# EAGLE board graduate project tinkercad (EAGLE 9.7.0)

Size 212.76 x 136.27 mm. Coordinates in mm from the lower left corner, seen from the top.
Outline: 0,0 212.76,0 212.76,136.27 0,136.27 0,0
Copper layers (1*16): Top 0.035mm / dielectric 1.5mm / Bottom 0.035mm
Design rules "default": minimum track width 6mil, minimum drill 0.35mm, track to track 6mil, track to pad 6mil, pad to pad 6mil, via to via 6mil, smd to smd 6mil, copper to edge 40mil, drill to drill 6mil, minimum pad ring 10mil, minimum via ring 8mil, stop-mask expansion 4mil, vias tented up to drill 0mil, thermal gap 10mil

## Footprints (pad centres in the part's own frame; a part is rotated, then mirrored left to right if it is on the bottom)
LEDRD254W60D565H860B = drill 0.981 pad 1.581: 1 -1.27,0; 2 1.27,0
RESAD1016W63L850D250B = drill 0.83 pad 1.43: 1 -5.08,0; 2 5.08,0
HA-06-SM065 = drill 1 pad 1.676: 1 -2.54,-2.54; 2 0,2.54; 3 2.54,-2.54
SWITCH-SPDT-PTH-8.5X3.7MM = drill 1.016 pad 1.88: 1 -2.54,0; 2 0,0; 3 2.54,0
ARDUINO-UNO-R3-SHIELD = drill 1.016 pad 1.88: 3.3V 24.13,-2.54; 5V 24.13,0; A0 24.13,12.7; A1 24.13,15.24; A2 24.13,17.78; A3 24.13,20.32; A4 24.13,22.86; A5 24.13,25.4; AREF -24.13,-13.97; D2 -24.13,20.32; D3 -24.13,17.78; D4 -24.13,15.24; D5 -24.13,12.7; D6 -24.13,10.16; D7 -24.13,7.62; D8 -24.13,3.81; D9 -24.13,1.27; D10 -24.13,-1.27; D11 -24.13,-3.81; D12 -24.13,-6.35; D13 -24.13,-8.89; GND@0 24.13,2.54; GND@1 24.13,5.08; GND@2 -24.13,-11.43; IOREF 24.13,-7.62; NC 24.13,-10.16; RES 24.13,-5.08; RX -24.13,25.4; SCL -24.13,-19.05; SDA -24.13,-16.51; TX -24.13,22.86; VIN 24.13,7.62
JHD-162A = drill 1.016 long: 1 -19.05,0; 2 -16.51,0; 3 -13.97,0; 4 -11.43,0; 5 -8.89,0; 6 -6.35,0; 7 -3.81,0; 8 -1.27,0; 9 1.27,0; 10 3.81,0; 11 6.35,0; 12 8.89,0; 13 11.43,0; 14 13.97,0; 15 16.51,0; 16 19.05,0
DIL16 = drill 0.813 long: 1 -8.89,-3.81; 2 -6.35,-3.81; 3 -3.81,-3.81; 4 -1.27,-3.81; 5 1.27,-3.81; 6 3.81,-3.81; 7 6.35,-3.81; 8 8.89,-3.81; 9 8.89,3.81; 10 6.35,3.81; 11 3.81,3.81; 12 1.27,3.81; 13 -1.27,3.81; 14 -3.81,3.81; 15 -6.35,3.81; 16 -8.89,3.81

## Placement (x,y rotation side)
D9  RED  [LEDRD254W60D565H860B]  91.09,56.82 180 top
D10  RED  [LEDRD254W60D565H860B]  96.17,56.82 180 top
D11  RED  [LEDRD254W60D565H860B]  101.25,56.82 180 top
D12  RED  [LEDRD254W60D565H860B]  106.33,56.82 180 top
D13  RED  [LEDRD254W60D565H860B]  111.41,56.82 180 top
D14  RED  [LEDRD254W60D565H860B]  116.49,56.82 180 top
D15  RED  [LEDRD254W60D565H860B]  121.57,56.82 180 top
D16  RED  [LEDRD254W60D565H860B]  126.65,56.82 180 top
R3  220  [RESAD1016W63L850D250B]  173.64,51.74 90 top
R11  220  [RESAD1016W63L850D250B]  89.82,49.2 90 top
R12  220  [RESAD1016W63L850D250B]  94.9,49.2 90 top
R13  220  [RESAD1016W63L850D250B]  99.98,49.2 90 top
R14  220  [RESAD1016W63L850D250B]  105.06,49.2 90 top
R15  220  [RESAD1016W63L850D250B]  110.14,49.2 90 top
R16  220  [RESAD1016W63L850D250B]  115.22,49.2 90 top
R17  220  [RESAD1016W63L850D250B]  120.3,49.2 90 top
R18  220  [RESAD1016W63L850D250B]  125.38,49.2 90 top
RPOT3  250k  [HA-06-SM065]  153.32,64.44 0 top
RPOT4  250k  [HA-06-SM065]  138.08,64.44 0 top
S10  TOGGLE  [SWITCH-SPDT-PTH-8.5X3.7MM]  166.02,64.44 0 top
S11  TOGGLE  [SWITCH-SPDT-PTH-8.5X3.7MM]  39.02,64.44 0 top
S12  TOGGLE  [SWITCH-SPDT-PTH-8.5X3.7MM]  46.64,64.44 0 top
S13  TOGGLE  [SWITCH-SPDT-PTH-8.5X3.7MM]  54.26,64.44 0 top
S14  TOGGLE  [SWITCH-SPDT-PTH-8.5X3.7MM]  61.88,64.44 0 top
S15  TOGGLE  [SWITCH-SPDT-PTH-8.5X3.7MM]  39.02,46.66 0 top
S16  TOGGLE  [SWITCH-SPDT-PTH-8.5X3.7MM]  46.64,46.66 0 top
S17  TOGGLE  [SWITCH-SPDT-PTH-8.5X3.7MM]  54.26,46.66 0 top
S18  TOGGLE  [SWITCH-SPDT-PTH-8.5X3.7MM]  61.88,46.66 0 top
U4  ARDUINO-UNO-R3-SHIELD  [ARDUINO-UNO-R3-SHIELD]  47.88,106.42 270 top
U6  LCD-16X2JHD-162A  [JHD-162A]  157.13,36.63 0 top
U7  PCF8574DIP16  [DIL16]  25.05,50.47 0 top
U8  PCF8574DIP16  [DIL16]  75.85,50.47 0 top

## Library data of the parts
D9-D16 = Tinkercad; CATEGORY: Opto-Electronic; SUB-CATEGORY: LED; VALUE: LED_RED
R3 R11-R18 RPOT3 RPOT4 S10-S18 U4 U6-U8 = Tinkercad

## Nets
D9_C: D9.2 R11.2
D10_C: D10.2 R12.2
D11_C: D11.2 R13.2
D12_C: D12.2 R14.2
D13_C: D13.2 R15.2
D14_C: D14.2 R16.2
D15_C: D15.2 R17.2
D16_C: D16.2 R18.2
U4_5V: D9.1 D10.1 D11.1 D12.1 D13.1 D14.1 D15.1 D16.1 R3.2 RPOT3.3 S10.1 S11.1 S12.1 S13.1 S14.1 S15.1 S16.1 S17.1 S18.1 U4.5V U6.2 U7.16 U8.1 U8.16
U4_A0: RPOT3.2 U4.A0
U4_A4: U4.A4 U7.15 U8.15
U4_A5: U4.A5 U7.14 U8.14
U4_D2: U4.D2 U6.4
U4_D3: U4.D3 U6.6
U4_D4: U4.D4 U6.11
U4_D5: U4.D5 U6.12
U4_D6: U4.D6 U6.13
U4_D7: U4.D7 U6.14
U4_GND: RPOT3.1 RPOT4.1 RPOT4.3 S10.3 S11.3 S12.3 S13.3 S14.3 S15.3 S16.3 S17.3 S18.3 U4.GND@0 U4.GND@1 U4.GND@2 U6.1 U6.5 U6.16 U7.1 U7.2 U7.3 U7.8 U8.2 U8.3 U8.8
U4_RX: S10.2 U4.RX
U6_LED+: R3.1 U6.15
U6_VO: RPOT4.2 U6.3
U7_P0: S15.2 U7.4
U7_P1: S16.2 U7.5
U7_P2: S17.2 U7.6
U7_P3: S18.2 U7.7
U7_P4: S14.2 U7.9
U7_P5: S13.2 U7.10
U7_P6: S12.2 U7.11
U7_P7: S11.2 U7.12
U8_P0: R18.1 U8.4
U8_P1: R17.1 U8.5
U8_P2: R16.1 U8.6
U8_P3: R15.1 U8.7
U8_P4: R14.1 U8.9
U8_P5: R13.1 U8.10
U8_P6: R12.1 U8.11
U8_P7: R11.1 U8.12

## Tracks (layer width: path | path; a pad name or v marks a point on that pad's centre or on a via)
D9_C  (1 unrouted)
D10_C  (1 unrouted)
D11_C  (1 unrouted)
D12_C  (1 unrouted)
D13_C  (1 unrouted)
D14_C  (1 unrouted)
D15_C  (1 unrouted)
D16_C  (1 unrouted)
U4_5V  (23 unrouted)
U4_A0  (1 unrouted)
U4_A4  (2 unrouted)
U4_A5  (2 unrouted)
U4_D2  (1 unrouted)
U4_D3  (1 unrouted)
U4_D4  (1 unrouted)
U4_D5  (1 unrouted)
U4_D6  (1 unrouted)
U4_D7  (1 unrouted)
U4_GND  (24 unrouted)
U4_RX  (1 unrouted)
U6_LED+  (1 unrouted)
U6_VO  (1 unrouted)
U7_P0  (1 unrouted)
U7_P1  (1 unrouted)
U7_P2  (1 unrouted)
U7_P3  (1 unrouted)
U7_P4  (1 unrouted)
U7_P5  (1 unrouted)
U7_P6  (1 unrouted)
U7_P7  (1 unrouted)
U8_P0  (1 unrouted)
U8_P1  (1 unrouted)
U8_P2  (1 unrouted)
U8_P3  (1 unrouted)
U8_P4  (1 unrouted)
U8_P5  (1 unrouted)
U8_P6  (1 unrouted)
U8_P7  (1 unrouted)